# EAGLE board usb (EAGLE 8.4.2)
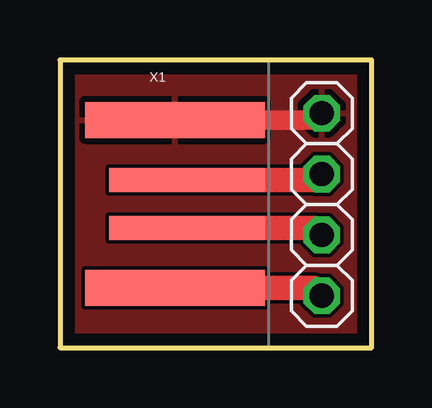
[diagram p0: board, top side]
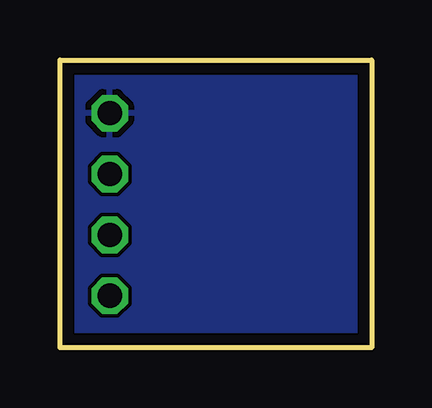
[diagram p1: board, bottom side, seen from below]

Size 13 x 12 mm. Coordinates in mm from the lower left corner, seen from the top.
Outline: 0,0 13,0 13,12 0,12 0,0
Copper layers (1*16): Top 0.035mm / dielectric 1.6mm / Bottom 0.035mm
Design rules "Elecrow_2-layer_PCB_eagle_rule": minimum track width 6mil, minimum drill 12mil, track to track 6mil, track to pad 6mil, pad to pad 6mil, via to via 8mil, smd to smd 0mil, copper to edge 20mil, drill to drill 10mil, minimum pad ring 6mil, minimum via ring 6mil, stop-mask expansion 0mil, vias tented up to drill 100mil, thermal gap 10mil

## Footprints (pad centres in the part's own frame; a part is rotated, then mirrored left to right if it is on the bottom)
1X01 = drill 1.016 octagon: 1 0,0
USB-A-PCB = smd 7.5 x 1.5: 5V -0.2,-3.5; GND -0.2,3.5 | smd 6.5 x 1: USB_M 0.3,-1; USB_P 0.3,1

## Placement (x,y rotation side)
JP1  [1X01]  10.92,7.24 0 top
JP2  [1X01]  10.92,4.7 0 top
JP3  [1X01]  10.92,2.16 0 top
JP4  [1X01]  10.92,9.78 0 top
X1  USBPCB  [USB-A-PCB]  5,6 0 top

## Library data of the parts
JP1-JP4 = pinhead+
X1 = usb

## Nets
5V: JP3.1 X1.5V
GND: JP4.1 X1.GND
USB_N: JP2.1 X1.USB_M
USB_P: JP1.1 X1.USB_P

## Tracks (layer width: path | path; a pad name or v marks a point on that pad's centre or on a via)
5V
  Top 1.016: JP3.1 10.58,2.5 X1.5V
GND
  Top 0.813: JP4.1 10.64,9.5 X1.GND
  pour Bottom: 0,0 13,0 13,12 0,12
  pour Top: 0,0 13,0 13,12 0,12
USB_N
  Top 1.016: JP2.1 10.62,5 X1.USB_M
USB_P
  Top 1.016: JP1.1 10.68,7 X1.USB_P